# EAGLE board rotaryEnc (EAGLE 9.1.2)
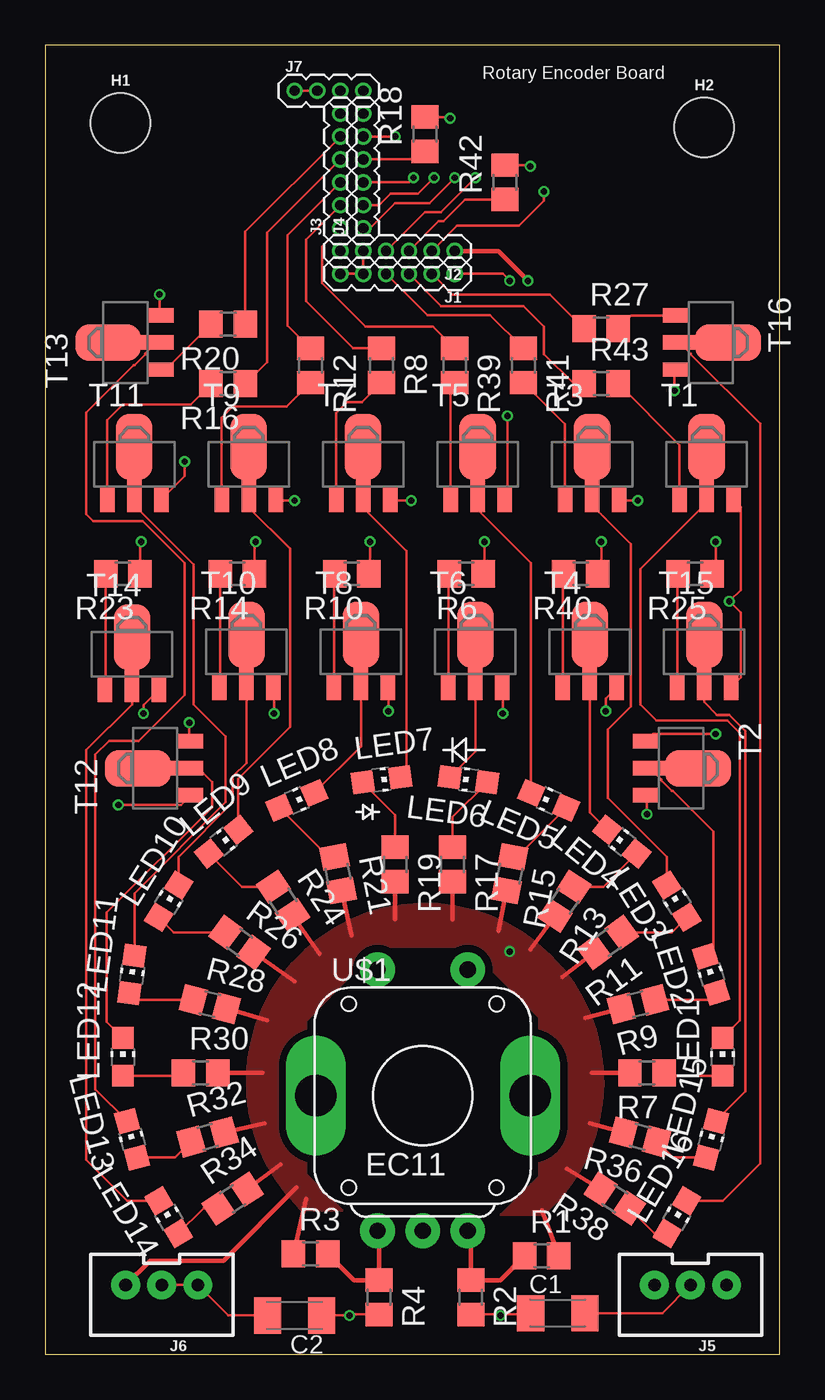
[diagram p0: board, top side]
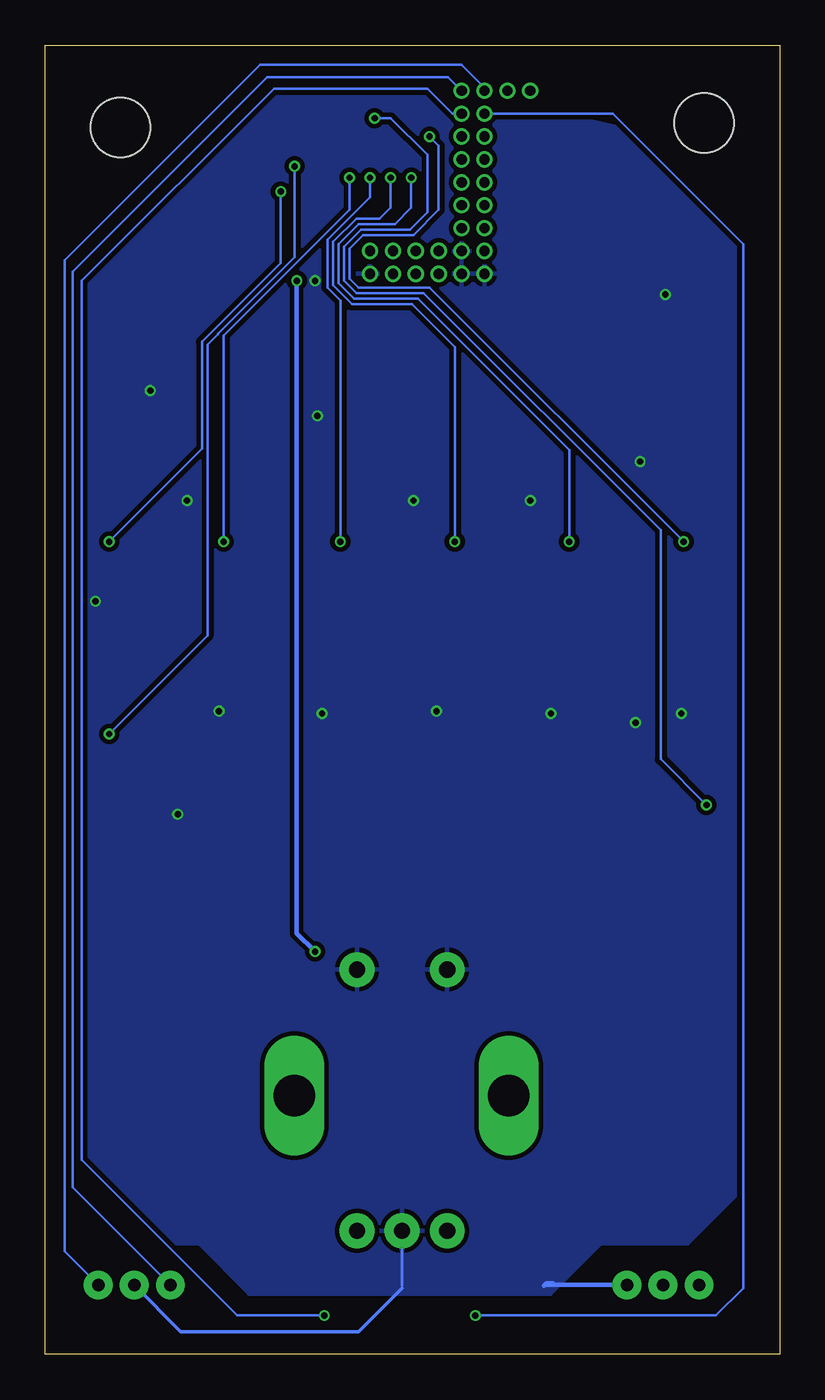
[diagram p1: board, bottom side, seen from below]

Size 40.77 x 72.64 mm. Coordinates in mm from the lower left corner, seen from the top.
Outline: 0,0 40.77,0.01 40.77,72.64 0,72.63 0,0
Copper layers (1*16): Top 0.035559375mm / dielectric 1.6mm / Bottom 0.035559375mm
Design rules "oshpark-2layer": minimum track width 6mil, minimum drill 10mil, track to track 6mil, track to pad 6mil, pad to pad 6mil, via to via 6mil, smd to smd 6mil, copper to edge 15mil, drill to drill 6mil, minimum pad ring 5mil, minimum via ring 5mil, stop-mask expansion 2.5mil, vias tented up to drill 0mil, thermal gap 10mil

## Footprints (pad centres in the part's own frame; a part is rotated, then mirrored left to right if it is on the bottom)
C1206K = smd 1.5 x 2: 1 -1.5,0; 2 1.5,0
STAND-OFF = hole 3.302: 0,0
1X06_1.27MM = drill 0.572 pad 0.9: 1 0,0; 2 1.27,0; 3 2.54,0; 4 3.81,0; 5 5.08,0; 6 6.35,0
JST-3-PTH-VERT = drill 0.7 pad 1.6: 1 -2,-0.55; 2 0,-0.55; 3 2,-0.55
1X04_1.27MM = drill 0.572 pad 0.9: 1 0,0; 2 1.27,0; 3 2.54,0; 4 3.81,0
CHIP-LED0805 = smd 1.2 x 1.2: A 0,-1.05; C 0,1.05
R0805 = smd 1.3 x 1.5: 1 -0.95,0; 2 0.95,0
SOT89-BCE = smd 0.8 x 1.4: B -1.499,-1.981; E 1.499,-1.981 | smd 0.8 x 1.9: C 0,-1.727 | smd 2.032 x 3.65: C@1 0,0.94
EC12 = drill 0.9 pad 1.93: 1 -2.5,-7.5; 2 0,-7.5; 3 2.5,-7.5; 4 -2.5,7; 5 2.5,7 | drill 2.3 long: M1 -5.918,0; M2 5.969,0

## Placement (x,y rotation side)
C1  .01uF  [C1206K]  28.45,2.29 0 top
C2  .01uF  [C1206K]  13.84,2.16 180 top
H1  STAND-OFF  [STAND-OFF]  4.19,68.33 0 top
H2  STAND-OFF  [STAND-OFF]  36.58,68.07 0 top
J1  [1X06_1.27MM]  22.73,59.94 180 top
J2  [1X06_1.27MM]  22.73,61.21 180 top
J3  [1X06_1.27MM]  16.38,62.48 90 top
J4  [1X06_1.27MM]  17.65,62.48 90 top
J5  [JST-3-PTH-VERT]  35.81,3.3 180 top
J6  [JST-3-PTH-VERT]  6.48,3.3 180 top
J7  [1X04_1.27MM]  13.84,70.1 0 top
LED1  [CHIP-LED0805]  37.59,16.51 0 top
LED2  [CHIP-LED0805]  36.96,21.08 17.5 top
LED3  [CHIP-LED0805]  35.05,25.15 31.9 top
LED4  [CHIP-LED0805]  32,28.45 51.2 top
LED5  [CHIP-LED0805]  27.94,30.73 66.8 top
LED6  [CHIP-LED0805]  23.49,31.88 82.5 top
LED7  [CHIP-LED0805]  18.67,31.88 277.5 top
LED8  [CHIP-LED0805]  13.97,30.73 293.2 top
LED9  [CHIP-LED0805]  9.91,28.45 308.8 top
LED10  [CHIP-LED0805]  6.86,25.15 328.1 top
LED11  [CHIP-LED0805]  4.83,21.08 352.5 top
LED12  [CHIP-LED0805]  4.32,16.51 0 top
LED13  [CHIP-LED0805]  4.83,11.94 14.9 top
LED14  [CHIP-LED0805]  6.86,7.62 30.8 top
LED15  [CHIP-LED0805]  36.96,11.94 345.1 top
LED16  [CHIP-LED0805]  35.05,7.62 329.2 top
R1  10k  [R0805]  27.56,5.46 0 top
R2  10k  [R0805]  23.62,3.17 270 top
R3  10k  [R0805]  14.73,5.59 0 top
R4  10k  [R0805]  18.54,3.17 270 top
R6  1k  [R0805]  23.37,43.31 180 top
R7  200  [R0805]  33.4,15.62 180 top
R8  1k  [R0805]  18.67,54.86 270 top
R9  200  [R0805]  32.89,19.43 194.6 top
R10  1k  [R0805]  17.02,43.31 180 top
R11  200  [R0805]  31.24,22.86 216.2 top
R12  1k  [R0805]  14.73,54.86 270 top
R13  200  [R0805]  28.83,25.15 236.9 top
R14  1k  [R0805]  10.67,43.31 180 top
R15  200  [R0805]  25.78,26.67 258.6 top
R16  1k  [R0805]  10.16,53.85 180 top
R17  200  [R0805]  22.61,27.18 270 top
R18  1k  [R0805]  21.08,67.69 90 top
R19  200  [R0805]  19.43,27.18 270 top
R20  1k  [R0805]  10.16,57.15 180 top
R21  200  [R0805]  16.26,26.67 281.4 top
R23  1k  [R0805]  4.32,43.31 180 top
R24  200  [R0805]  13.21,25.15 303.7 top
R25  1k  [R0805]  36.07,43.31 180 top
R26  200  [R0805]  10.79,22.86 323.8 top
R27  1k  [R0805]  30.86,56.9 0 top
R28  200  [R0805]  9.14,19.43 345.4 top
R30  200  [R0805]  8.64,15.62 0 top
R32  200  [R0805]  9.02,12.06 15.4 top
R34  200  [R0805]  10.41,8.64 33.5 top
R36  200  [R0805]  33.02,12.06 164.6 top
R38  200  [R0805]  31.62,8.64 146.5 top
R39  1k  [R0805]  22.73,54.86 270 top
R40  1k  [R0805]  29.72,43.31 180 top
R41  1k  [R0805]  26.54,54.86 270 top
R42  1k  [R0805]  25.53,65.02 90 top
R43  1k  [R0805]  30.86,53.85 0 top
T1  [SOT89-BCE]  36.7,49.4 0 top
T2  [SOT89-BCE]  35.31,32.51 270 top
T3  [SOT89-BCE]  30.35,49.4 0 top
T4  [SOT89-BCE]  30.23,38.99 0 top
T5  [SOT89-BCE]  24,49.4 0 top
T6  [SOT89-BCE]  23.88,38.99 0 top
T7  [SOT89-BCE]  17.65,49.4 0 top
T8  [SOT89-BCE]  17.53,38.99 0 top
T9  [SOT89-BCE]  11.3,49.4 0 top
T10  [SOT89-BCE]  11.18,38.99 0 top
T11  [SOT89-BCE]  4.95,49.4 0 top
T12  [SOT89-BCE]  6.1,32.51 90 top
T13  [SOT89-BCE]  4.45,56.13 90 top
T14  [SOT89-BCE]  4.83,38.86 0 top
T15  [SOT89-BCE]  36.58,38.99 0 top
T16  [SOT89-BCE]  36.96,56.13 270 top
U$1  EC11  [EC12]  20.95,14.35 0 top

## Library data of the parts
C1 C2 = rcl; SPICEPREFIX: C
H1 H2 = SparkFun-Hardware
J1-J4 J7 = SparkFun-Connectors
J5 J6 = SparkFun-Connectors; PROD_ID: CONN-13230
LED1-LED16 = led
R1-R4 R6-R21 R23-R28 R30 R32 R34 R36 R38-R43 = resistor
T1-T16 = transistor-neu-to92
U$1 = rotary-encoder

## Nets
$B3: R1.1 R2.1 U$1.3
$RA1: R3.2 R4.1 U$1.1
A0: J2.4 R40.1
A1: J1.4 R41.1
A2: J2.3 R42.1
A3: J1.3 R43.1
A4: J2.2 R25.1
A5: J1.2 R27.1
AREF: J2.6
D0: J5.3 J7.4
D1: J5.1 J7.3
D2: C1.1 J4.6 R2.2
D3: C2.1 J3.6 R4.2
D4: J4.5 R23.1
D5: J3.5 R20.1
D6: J4.4 R18.1
D7: J3.4 R16.1
D8: J4.3 R14.1
D9: J3.3 R12.1
D10: J4.2 R10.1
D11: J3.2 R8.1
D12: J4.1 R6.1
D13: J3.1 R39.1
GND: C1.2 C2.2 J1.1 J1.5 J1.6 J2.5 J5.2 J6.1 J6.2 T1.E T2.E T3.E T4.E T5.E T6.E T7.E T8.E T9.E T10.E T11.E T12.E T13.E T14.E T15.E T16.E U$1.2 U$1.4 U$1.5
M: U$1.M2
M1: U$1.M1
N$5: R43.2 T1.B
N$6: LED1.C T1.C
N$7: LED1.A R7.1
N$8: LED2.C T2.C
N$9: LED2.A R9.1
N$10: R42.2 T2.B
N$11: LED3.C T3.C
N$12: LED3.A R11.1
N$13: R41.2 T3.B
N$14: LED4.C T4.C
N$15: LED4.A R13.1
N$16: R40.2 T4.B
N$17: LED5.C T5.C
N$18: LED5.A R15.1
N$19: R39.2 T5.B
N$20: LED6.C T6.C
N$21: LED6.A R17.1
N$22: R6.2 T6.B
N$23: LED7.C T7.C
N$24: LED7.A R19.1
N$25: R8.2 T7.B
N$26: LED8.C T8.C
N$27: LED8.A R21.1
N$28: R10.2 T8.B
N$29: LED9.C T9.C
N$30: LED9.A R24.1
N$31: R12.2 T9.B
N$32: LED10.C T10.C
N$33: LED10.A R26.1
N$34: R14.2 T10.B
N$35: LED11.C T11.C
N$36: LED11.A R28.1
N$37: R16.2 T11.B
N$38: LED12.C T12.C
N$39: LED12.A R30.1
N$40: R18.2 T12.B
N$41: LED13.C T13.C
N$42: LED13.A R32.1
N$43: R20.2 T13.B
N$44: LED14.C T14.C
N$45: LED14.A R34.1
N$46: R23.2 T14.B
N$47: LED15.C T15.C
N$48: LED15.A R36.1
N$49: R25.2 T15.B
N$50: LED16.C T16.C
N$51: LED16.A R38.1
N$52: R27.2 T16.B
NC: J7.1 J7.2
VIN: J2.1 J6.3 R1.2 R3.1 R7.2 R9.2 R11.2 R13.2 R15.2 R17.2 R19.2 R21.2 R24.2 R26.2 R28.2 R30.2 R32.2 R34.2 R36.2 R38.2

## Tracks (layer width: path | path; a pad name or v marks a point on that pad's centre or on a via)
$B3
  Top 0.254: R1.1 25.27,4.12 R2.1 23.62,6.68 U$1.3
$RA1
  Top 0.254: U$1.1 18.54,6.76 R4.1 17.14,4.12 R3.2
A0  (via drill 0.35)
  Top 0.152: R40.1 30.86,43.5 v30.86,45.09 | J2.4 21.08,63.37 21.97,63.37 v23.88,65.28
  Bottom 0.152: v23.88,65.28 23.88,63.5 30.86,56.52 v30.86,45.09
A1
  Top 0.152: J1.4 21.21,57.66 24.7,57.66 R41.1
A2
  Top 0.152: J2.3 21.84,62.86 22.1,62.86 23.31,64.07 R42.1
A3
  Top 0.152: J1.3 21.97,58.17 26.54,58.17 27.69,57.02 27.69,55.5 29.34,53.85 R43.1
A4  (via drill 0.35)
  Top 0.152: R25.1 37.21,43.5 v37.21,45.09 | J2.2 22.86,62.61 26.29,62.61 27.69,64.01 v27.69,64.52
  Bottom 0.152: v27.69,64.52 27.69,60.55 32.05,56.18 32.05,50.24 v37.21,45.09
A5
  Top 0.152: J1.2 22.61,58.8 28.01,58.8 R27.1
D0
  Bottom 0.152: J5.3 39.24,9.28 39.24,60.07 28.45,70.87 18.41,70.87 J7.4
D1
  Bottom 0.152: J5.1 39.68,5.71 39.68,60.71 28.84,71.54 17.65,71.54 16.38,70.27 J7.3
D2  (via drill 0.35)
  Top 0.152: R2.2 25.21,2.22 | 25.21,2.22 v25.27,2.16 | C1.1 26.88,2.22 25.21,2.22
  Top 0.254: 26.89,2.22 C1.1
  Bottom 0.152: v25.27,2.16 30.1,2.16 38.73,10.79 38.73,59.56 28.07,70.23 19.56,70.23 18.16,68.83 J4.6
D3  (via drill 0.35)
  Top 0.152: C2.1 v16.89,2.16 16.96,2.22 R4.2
  Top 0.254: 15.41,2.22 C2.1
  Bottom 0.152: v16.89,2.16 3.56,2.16 2.03,3.68 2.03,61.59 9.27,68.83 J3.6
D4  (via drill 0.35)
  Top 0.152: R23.1 5.27,45.02 v5.33,45.09 | v19.43,67.56 J4.5
  Bottom 0.152: v19.43,67.56 18.92,67.06 18.92,63.5 20.32,62.1 23.11,62.1 23.88,61.34 23.88,59.69 23.36,59.18 19.88,59.18 19.87,59.18 19.43,59.18 v5.33,45.09
D5
  Top 0.152: J3.5 11.11,62.29 R20.1
D6
  Top 0.152: J4.4 20.63,66.29 R18.1
D7
  Top 0.152: J3.4 12.32,62.23 12.32,55.06 R16.1
D8  (via drill 0.35)
  Top 0.152: R14.1 11.62,45.02 v11.68,45.09 | J4.3 20.19,65.02 v20.45,65.28
  Bottom 0.152: v20.45,65.28 20.45,63.63 21.36,62.71 23.37,62.71 24.49,61.59 24.49,59.44 23.61,58.57 20.09,58.57 11.68,50.16 v11.68,45.09
D9
  Top 0.152: J3.3 13.46,62.1 13.46,57.08 R12.1
D10  (via drill 0.35)
  Top 0.152: R10.1 18.03,43.37 v18.03,45.09 | J4.2 18.54,63.75 19.18,64.39 20.7,64.39 v21.59,65.28
  Bottom 0.152: v21.59,65.28 21.59,63.63 22.2,63.02 23.49,63.02 24.79,61.72 24.79,59.31 23.74,58.26 20.41,58.26 18.03,55.88 v18.03,45.09
D11
  Top 0.152: J3.2 14.48,61.85 14.48,58.42 17.08,55.81 R8.1
D12  (via drill 0.35)
  Top 0.152: R6.1 24.38,43.37 v24.38,45.09 | J4.1 18.03,62.48 19.43,63.88 21.34,63.88 v22.73,65.28
  Bottom 0.152: v22.73,65.28 22.73,64.21 25.09,61.85 25.09,59.18 24.38,58.47 v24.38,45.09
D13
  Top 0.152: J3.1 15.37,61.47 15.37,59.44 17.78,57.02 21.52,57.02 R39.1
GND  (via drill 0.35)
  Top 0.152: J2.5 J1.5 J1.6 | J6.2 J6.1 10.17,2.16 C2.2 | v25.78,59.56 25.4,59.94 J1.1 | J5.2 34.25,2.29 C1.2 | v34.93,53.47 34.93,54.58 T16.E | v32.89,47.37 31.9,47.37 T3.E | T15.E 38.61,37.54 38.61,41.15 v37.97,41.78 38.61,42.42 38.61,47.02 T1.E | v33.4,29.97 33.4,30.94 T2.E | v31.12,35.69 31.12,36.4 T4.E | v25.4,35.56 25.4,36.98 T6.E | v19.05,35.69 19.05,36.98 T8.E | v12.7,35.56 12.7,36.98 T10.E | v8,35.05 8,34.09 T12.E | v5.46,35.56 5.46,36.02 T14.E | v7.75,49.53 7.75,48.72 T11.E | v6.35,58.8 6.35,57.71 T13.E | v13.84,47.37 12.85,47.37 T9.E | v20.32,47.37 19.2,47.37 T7.E | v25.65,52.07 25.65,47.57 T5.E
  Bottom 0.152: 20.95,3.68 U$1.2
  Bottom 0.203: J5.2 33.23,1.27 23.37,1.27 20.95,3.68
  Bottom 0.254: J6.1 13.04,3.85 13.08,3.81 12.95,3.94 12.57,3.94
  pour Bottom (isolate 0.254): 20.57,70.74 29.72,70.74 38.86,61.59 38.86,8.76 36.58,6.48 36.2,6.1 32.26,6.1 29.46,3.3 12.7,3.3 9.91,6.1 5.08,6.1 1.78,9.4 1.78,15.11 1.78,61.09 8.76,68.2 11.3,70.74 8.76,68.07
N$5
  Top 0.152: R43.2 35.2,50.45 T1.B
N$6
  Top 0.152: T1.C 36.7,47.24 33.02,43.56 33.02,36.07 33.91,35.18 37.85,35.18 38.55,34.47 38.55,18.52 LED1.C
N$7
  Top 0.152: LED1.A 34.51,15.46 R7.1
N$8
  Top 0.152: 34.16,32.51 T2.C 34.19,31.9 34.19,31.85 34.77,31.27 34.82,31.27 37.08,29.01 37.08,22.53 36.68,22.12 | 36.7,22.14 36.68,22.12 | 36.68,22.12 LED2.C
N$9
  Top 0.152: LED2.A 36.86,19.67 R9.1
N$10  (via drill 0.35)
  Top 0.152: T2.B 33.73,34.42 v37.21,34.42 | R42.2 26.86,65.97 v26.92,65.91
  Bottom 0.152: v26.92,65.91 26.92,60.88 31.17,56.64 31.17,56.59 31.75,56.01 31.75,39.88 v37.21,34.42
N$11
  Top 0.152: 30.35,47.12 T3.C 30.35,47.12 | 30.35,47.12 32.51,44.96 32.51,35.94 31.24,34.67 31.24,30.86 34.5,27.61 LED3.C
N$12
  Top 0.152: LED3.A 34.77,23.42 R11.1
N$13
  Top 0.152: R41.2 28.85,51.6 T3.B
N$14
  Top 0.152: T4.C 30.23,30.07 LED4.C
N$15
  Top 0.152: LED4.A 30.97,25.94 R13.1
N$16
  Top 0.152: R40.2 28.73,43.27 T4.B
N$17
  Top 0.152: T5.C 24,46.86 26.98,43.89 LED5.C
N$18
  Top 0.152: LED5.A 26.19,27.6 R15.1
N$19
  Top 0.152: R39.2 22.5,53.68 T5.B
N$20
  Top 0.152: T6.C 23.88,33.44 LED6.C
N$21
  Top 0.152: LED6.A 22.61,29.81 R17.1
N$22
  Top 0.152: R6.2 22.38,43.27 T6.B
N$23
  Top 0.152: T7.C 17.65,46.99 20.07,44.58 20.07,32.37 LED7.C
N$24
  Top 0.152: LED7.A 19.43,29.94 R19.1
N$25
  Top 0.152: R8.2 17.59,52.83 16.76,52.83 16.15,52.22 T7.B
N$26
  Top 0.152: T8.C 17.53,33.74 LED8.C
N$27
  Top 0.152: LED8.A 15.72,27.6 R21.1
N$28
  Top 0.152: R10.2 16.03,43.27 T8.B
N$29
  Top 0.152: T9.C 11.3,46.99 13.59,44.7 13.59,34.8 10.72,31.93 LED9.C
N$30
  Top 0.152: LED9.A 10.94,25.94 R24.1
N$31
  Top 0.152: R12.2 13.4,52.58 10.41,52.58 9.8,51.97 T9.B
N$32
  Top 0.152: T10.C 11.18,32.82 10.42,32.06 10.42,30.61 7.41,27.61 LED10.C
N$33
  Top 0.152: LED10.A 7.14,23.42 R26.1
N$34
  Top 0.152: R14.2 9.72,37.05 T10.B
N$35
  Top 0.152: T11.C 4.95,47.12 8.25,43.81 8.25,36.07 10.03,34.29 10.03,30.66 4.96,25.59 LED11.C
N$36
  Top 0.152: LED11.A 5.06,19.67 R28.1
N$37
  Top 0.152: R16.2 8.07,52.7 4.32,52.7 3.45,51.84 T11.B
N$38
  Top 0.152: T12.C 8.51,32.51 9.27,31.75 9.27,30.35 3.43,24.51 3.43,18.45 LED12.C
N$39
  Top 0.152: LED12.A 7.52,15.46 R30.1
N$40  (via drill 0.35)
  Top 0.152: T12.B 7.54,30.48 v4.06,30.48 | R18.2 22.42,68.64 v22.48,68.58
  Bottom 0.152: v22.48,68.58 21.59,68.58 19.56,66.55 19.56,63.37 20.52,62.41 23.24,62.41 24.18,61.47 24.18,59.56 23.49,58.87 19.75,58.87 6.6,45.72 6.6,33.02 v4.06,30.48
N$41
  Top 0.152: T13.C 5.56,55.52 5.56,55.47 4.98,54.89 4.93,54.89 2.29,52.25 2.29,46.61 2.67,46.23 5.41,46.23 7.75,43.89 7.75,36.58 5.21,34.04 3.56,34.04 2.79,33.27 2.79,14.71 LED13.C
N$42
  Top 0.152: LED13.A 7.21,10.92 R32.1
N$43
  Top 0.152: R20.2 6.7,54.63 T13.B
N$44
  Top 0.152: T14.C 4.83,36.07 2.29,33.53 2.29,10.79 4.56,8.52 LED14.C
N$45
  Top 0.152: LED14.A 8.79,8.11 R34.1
N$46
  Top 0.152: R23.2 3.37,36.92 T14.B
N$47
  Top 0.152: T15.C 36.58,36.2 37.29,35.48 37.97,35.48 38.86,34.59 38.86,14.59 LED15.C
N$48
  Top 0.152: LED15.A 34.82,10.92 R36.1
N$49
  Top 0.152: R25.2 35.08,43.27 T15.B
N$50
  Top 0.152: T16.C 35.84,55.52 35.84,55.47 39.68,51.64 39.68,10.59 37.6,8.52 LED16.C
N$51
  Top 0.152: LED16.A 33.81,6.72 R38.1
N$52
  Top 0.152: R27.2 32.55,57.63 T16.B
NC
  Top 0.152: J7.1 J7.2
VIN  (via drill 0.35)
  Top 0.254: R34.2 13.08,10.54 | R32.2 12.19,12.83 | R30.2 12.06,15.62 | R28.2 12.32,18.54 | R26.2 13.84,20.7 | R24.2 15.24,22.23 | R21.2 17.02,23.24 | R19.2 19.43,24.13 | R17.2 22.61,24.13 | R15.2 25.15,23.5 | R13.2 26.92,22.48 | R11.2 28.7,20.96 | R9.2 29.97,18.67 | R7.2 30.35,15.62 | R36.2 30.23,12.83 | 28.96,10.29 R38.2 | R1.2 27.56,8 | R3.1 14.48,8.64 | J6.3 5.83,5.21 9.91,5.21 13.97,9.27 | v26.8,59.56 25.15,61.21 J2.1 | 27.56,8
  Bottom 0.254: v25.78,22.35 26.8,23.37 v26.8,59.56
  pour Top (isolate 0.406): 16.51,8 14.22,8 14.1,8.13 arc-272 27.81,7.87 27.56,7.75 25.27,7.75 27.43,9.91 27.43,18.67 24.89,21.21 23.49,22.61 18.54,22.61 17.14,21.21 14.48,18.47 14.48,10.03

## Text on the board
tNames: Rotary Encoder Board